# EAGLE board TFG_sch_V2 (EAGLE 7.5.0)
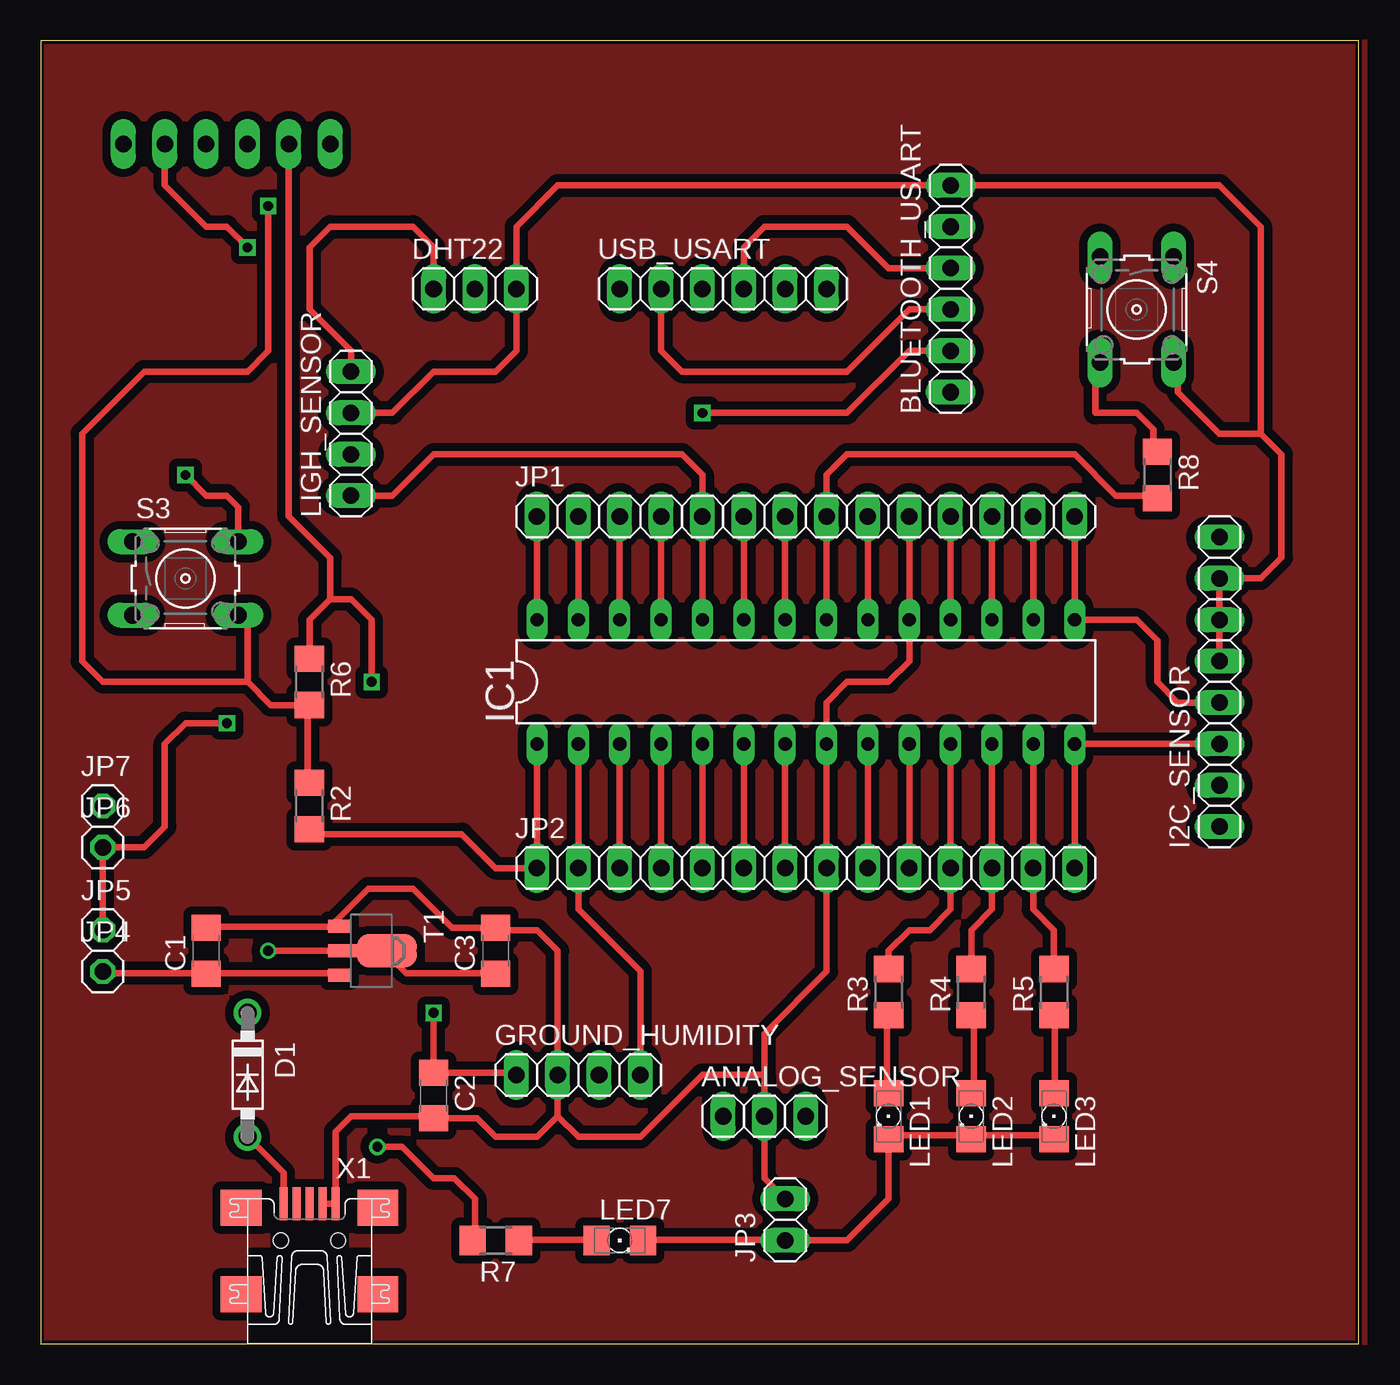
[diagram p0: board, top side]
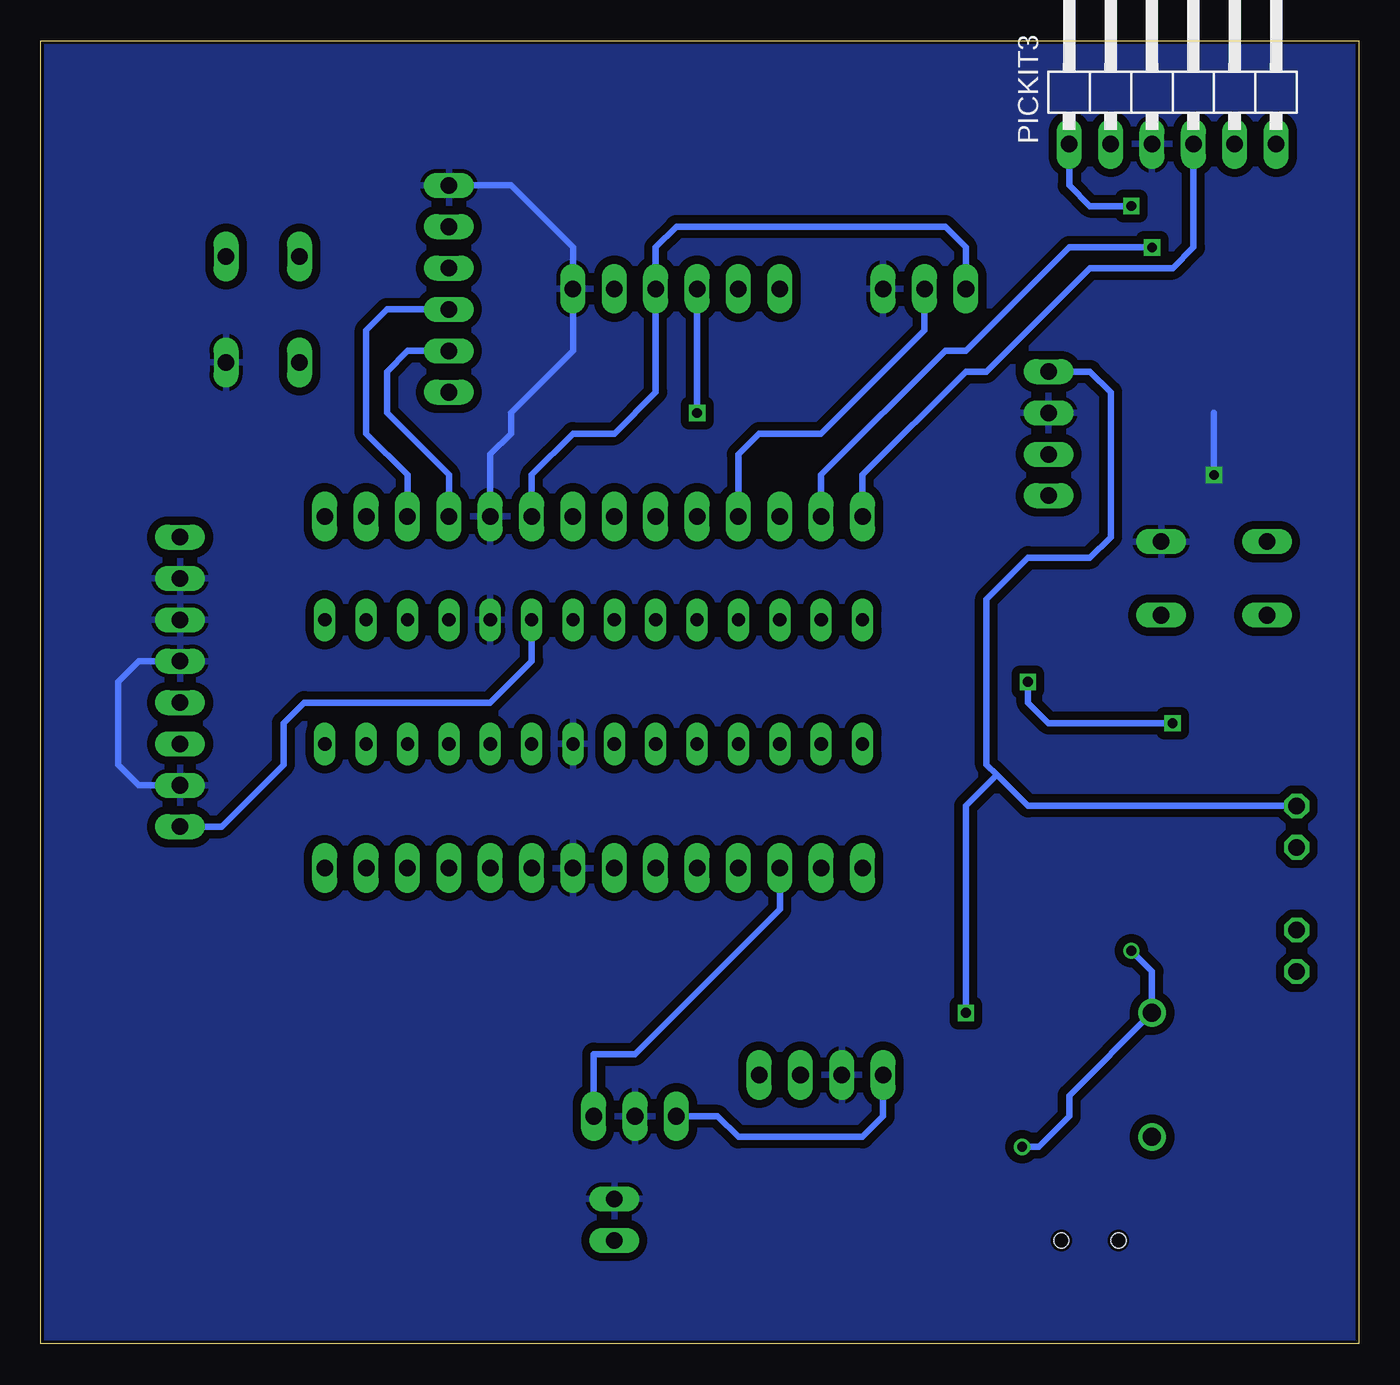
[diagram p1: board, bottom side, seen from below]

Size 80.95 x 80 mm. Coordinates in mm from the lower left corner, seen from the top.
Outline: 0,0 80.95,0 80.95,80 0,80 0,0
Copper layers (1*16): Top 0.035mm / dielectric 1.5mm / Bottom 0.035mm
Design rules "default *": minimum track width 16mil, minimum drill 16mil, track to track 20mil, track to pad 8mil, pad to pad 8mil, via to via 8mil, smd to smd 8mil, copper to edge 8mil, drill to drill 8mil, minimum pad ring 10mil, minimum via ring 8mil, stop-mask expansion 4mil, vias tented up to drill 0mil, thermal gap 10mil
Net classes: 0 PCB: width 0.004 mm

## Footprints (pad centres in the part's own frame; a part is rotated, then mirrored left to right if it is on the bottom)
1X03 = drill 1.016 long: 1 -2.54,0; 2 0,0; 3 2.54,0
1X06 = drill 1.016 long: 1 -6.35,0; 2 -3.81,0; 3 -1.27,0; 4 1.27,0; 5 3.81,0; 6 6.35,0
C1206 = smd 1.6 x 1.8: 1 -1.4,0; 2 1.4,0
DO41-7.6 = drill 1.1 pad 1.7: A 3.81,0; C -3.81,0
1X04 = drill 1.016 long: 1 -3.81,0; 2 -1.27,0; 3 1.27,0; 4 3.81,0
1X08 = drill 1.016 long: 1 -8.89,0; 2 -6.35,0; 3 -3.81,0; 4 -1.27,0; 5 1.27,0; 6 3.81,0; 7 6.35,0; 8 8.89,0
DIL28-3 = drill 0.813 long: 1 -16.51,-3.81; 2 -13.97,-3.81; 3 -11.43,-3.81; 4 -8.89,-3.81; 5 -6.35,-3.81; 6 -3.81,-3.81; 7 -1.27,-3.81; 8 1.27,-3.81; 9 3.81,-3.81; 10 6.35,-3.81; 11 8.89,-3.81; 12 11.43,-3.81; 13 13.97,-3.81; 14 16.51,-3.81; 15 16.51,3.81; 16 13.97,3.81; 17 11.43,3.81; 18 8.89,3.81; 19 6.35,3.81; 20 3.81,3.81; 21 1.27,3.81; 22 -1.27,3.81; 23 -3.81,3.81; 24 -6.35,3.81; 25 -8.89,3.81; 26 -11.43,3.81; 27 -13.97,3.81; 28 -16.51,3.81
1X14 = drill 1.016 long: 1 -16.51,0; 2 -13.97,0; 3 -11.43,0; 4 -8.89,0; 5 -6.35,0; 6 -3.81,0; 7 -1.27,0; 8 1.27,0; 9 3.81,0; 10 6.35,0; 11 8.89,0; 12 11.43,0; 13 13.97,0; 14 16.51,0
1X02 = drill 1.016 long: 1 -1.27,0; 2 1.27,0
1X01 = drill 1.016 octagon: 1 0,0
LED_1206 = smd 1.6 x 1.803: A -1.422,0; C 1.422,0
1X06/90 = drill 1.016 long: 1 -6.35,-3.81; 2 -3.81,-3.81; 3 -1.27,-3.81; 4 1.27,-3.81; 5 3.81,-3.81; 6 6.35,-3.81
R1206 = smd 1.6 x 1.803: 1 -1.422,0; 2 1.422,0
B3F-10XX = drill 1.016 long: 1 -3.251,2.261; 2 3.251,2.261; 3 -3.251,-2.261; 4 3.251,-2.261
SOT89 = smd 0.8 x 1.4: 1 -1.499,-1.981; 3 1.499,-1.981 | smd 0.8 x 1.9: 2 0,-1.727 | smd 2.032 x 3.65: 2@1 0,0.94
UX60-MB-5ST = smd 2 x 0.5: 1 2.25,1.6; 2 2.25,0.8; 3 2.25,0; 4 2.25,-0.8; 5 2.25,-1.6 | smd 2.2 x 2.5: M1 -3.3,-4.2; M2 -3.3,4.2; M3 2,4.2; M4 2,-4.2 | hole 0.9: 0,-1.75; 0,1.75

## Placement (x,y rotation side)
ANALOG_SENSOR  [1X03]  44.45,13.97 0 top
BLUETOOTH_USART  [1X06]  55.88,64.77 90 top
C1  10uF  [C1206]  10.16,24.13 90 top
C2  1uF  [C1206]  24.13,15.24 270 top
C3  10uF  [C1206]  27.94,24.13 90 top
D1  1N5819-T  [DO41-7.6]  12.7,16.51 270 top
DHT22  [1X03]  26.67,64.77 0 top
GROUND_HUMIDITY  [1X04]  33.02,16.51 0 top
I2C_SENSOR  [1X08]  72.39,40.64 90 top
IC1  PIC18F2580-I/SP  [DIL28-3]  46.99,40.64 0 top
JP1  [1X14]  46.99,50.8 0 top
JP2  [1X14]  46.99,29.21 0 top
JP3  [1X02]  45.72,7.62 90 top
JP4  Vusb  [1X01]  3.81,22.86 0 top
JP5  Vcc  [1X01]  3.81,25.4 0 top
JP6  Current Meter  [1X01]  3.81,30.48 0 top
JP7  Current Meter  [1X01]  3.81,33.02 0 top
LED1  [LED_1206]  52.07,13.97 270 top
LED2  [LED_1206]  57.15,13.97 270 top
LED3  [LED_1206]  62.23,13.97 270 top
LED7  [LED_1206]  35.56,6.35 0 top
LIGH_SENSOR  [1X04]  19.05,55.88 90 top
PICKIT3  [1X06/90]  11.43,77.47 0 bottom
R2  470  [R1206]  16.51,33.02 270 top
R3  470  [R1206]  52.07,21.59 90 top
R4  470  [R1206]  57.15,21.59 90 top
R5  470  [R1206]  62.23,21.59 90 top
R6  470  [R1206]  16.51,40.64 270 top
R7  470  [R1206]  27.94,6.35 180 top
R8  470  [R1206]  68.58,53.34 270 top
S3  [B3F-10XX]  8.89,46.99 0 top
S4  [B3F-10XX]  67.31,63.5 270 top
T1  AP1115  [SOT89]  20.32,24.13 270 top
USB_USART  [1X06]  41.91,64.77 0 top
X1  MINI-USB-UX60-MB-5ST  [UX60-MB-5ST]  16.51,6.35 90 top

## Library data of the parts
ANALOG_SENSOR BLUETOOTH_USART DHT22 GROUND_HUMIDITY I2C_SENSOR JP1-JP7 LIGH_SENSOR PICKIT3 USB_USART = pinhead
C1-C3 = rcl
D1 = diode
IC1 = microchip; MF: MICROCHIP; MPN: PIC18F2580-I/SP; OC_FARNELL: 9321276; OC_NEWARK: 71J7244
LED1-LED3 LED7 = eagle-ltspice; SPICEMODEL: NONE; SPICEPREFIX: D; SPICETYPE: diode
R2-R8 = resistor
S3 S4 = switch-omron; MPN: B3F-1000; OC_FARNELL: 176432; OC_NEWARK: 36M3542
T1 = zetex; OC_FARNELL: unknown; OC_NEWARK: unknown
X1 = con-hirose; OC_FARNELL: unknown; OC_NEWARK: unknown

## Nets
GND: ANALOG_SENSOR.2 BLUETOOTH_USART.6 C1.2 C2.2 C3.2 DHT22.3 GROUND_HUMIDITY.2 I2C_SENSOR.2 I2C_SENSOR.5 I2C_SENSOR.6 I2C_SENSOR.7 IC1.8 IC1.19 JP1.10 JP2.8 JP3.2 LIGH_SENSOR.3 PICKIT3.3 S3.2 S4.2 T1.1 USB_USART.6 X1.4 X1.5
N$1: PICKIT3.1 R2.1 R6.2 S3.4
N$2: GROUND_HUMIDITY.4 IC1.2 JP2.2
N$3: ANALOG_SENSOR.3 IC1.3 JP2.3
N$4: IC1.4 JP2.4
N$5: IC1.5 JP2.5
N$6: IC1.6 JP2.6
N$7: IC1.7 JP2.7
N$8: I2C_SENSOR.3 IC1.14 JP2.14
N$9: IC1.9 JP2.9
N$10: IC1.10 JP2.10
N$11: IC1.11 JP2.11 R3.2
N$12: IC1.12 JP2.12 R4.2
N$13: IC1.13 JP2.13 R5.2
N$15: IC1.28 JP1.1 PICKIT3.4
N$16: IC1.27 JP1.2 PICKIT3.5
N$17: IC1.26 JP1.3
N$18: DHT22.2 IC1.25 JP1.4
N$19: IC1.24 JP1.5 LIGH_SENSOR.1
N$20: IC1.23 JP1.6
N$21: IC1.22 JP1.7
N$22: IC1.21 JP1.8 R8.2
N$23: IC1.1 JP2.1 R2.2
N$24: R8.1 S4.4
N$25: BLUETOOTH_USART.2 IC1.18 JP1.11 USB_USART.3
N$26: BLUETOOTH_USART.3 IC1.17 JP1.12 USB_USART.2
N$27: IC1.16 JP1.13
N$28: I2C_SENSOR.4 IC1.15 JP1.14
N$29: PICKIT3.6
N$31: LED1.A R3.1
N$32: LED2.A R4.1
N$33: LED3.A R5.1
N$34: JP3.1 LED1.C LED2.C LED3.C LED7.C
N$35: LED7.A R7.1
N$36: D1.A X1.1
N$37: C3.1 D1.C R7.2 T1.2 T1.2@1
N$38: JP5.1 JP6.1 PICKIT3.2 R6.1
VCC: ANALOG_SENSOR.1 BLUETOOTH_USART.4 C2.1 DHT22.1 GROUND_HUMIDITY.1 I2C_SENSOR.1 IC1.20 JP1.9 JP7.1 LIGH_SENSOR.4 USB_USART.4
VO: C1.1 JP4.1 T1.3

## Tracks (layer width: path | path; a pad name or v marks a point on that pad's centre or on a via)
GND  (via drill 0.6)
  Top 0.406: 17.78,25.6 10.36,25.6 C1.2 | 17.78,25.6 18.19,25.6 T1.1 | 44.5,13.87 ANALOG_SENSOR.2 | 17.78,25.6 20.12,27.94 22.86,27.94 25.27,25.53 C3.2 28.07,25.4 30.48,25.4 31.75,24.13 GROUND_HUMIDITY.2 31.75,13.97 | LIGH_SENSOR.3 21.59,57.15 24.13,59.69 27.94,59.69 29.21,60.96 DHT22.3 29.21,68.58 31.75,71.12 BLUETOOTH_USART.6 72.39,71.12 74.93,68.58 74.93,55.88 | JP1.10 IC1.19 53.34,41.91 52.07,40.64 49.53,40.64 48.26,39.37 IC1.8 JP2.8 48.26,22.86 44.45,19.05 44.45,16.51 | I2C_SENSOR.5 I2C_SENSOR.6 I2C_SENSOR.7 74.93,46.99 76.2,48.26 76.2,54.61 74.93,55.88 | 74.93,55.88 72.39,55.88 69.85,58.42 69.85,59.97 S4.2 | 31.75,13.97 30.48,12.7 27.94,12.7 26.8,13.84 C2.2 24,13.97 19.05,13.97 18.11,13.03 X1.5 X1.4 | 31.75,13.97 33.02,12.7 36.83,12.7 40.64,16.51 44.45,16.51 | 44.45,16.51 ANALOG_SENSOR.2 | JP3.2 44.45,10.16 ANALOG_SENSOR.2 | S3.2 12.14,51.36 11.43,52.07 10.16,52.07 v8.89,53.34
  Bottom 0.406: I2C_SENSOR.2 74.93,34.29 76.2,35.56 76.2,40.64 74.93,41.91 I2C_SENSOR.5 | BLUETOOTH_USART.6 52.07,71.12 48.26,67.31 USB_USART.6 48.26,60.96 52.07,57.15 52.07,55.88 53.34,54.61 JP1.10 | v8.89,53.34 8.89,57.15
  pour Bottom: 0,80.01 81.28,80.01 81.28,0 0,0
N$1  (via drill 0.6)
  Top 0.406: R2.1 16.41,34.49 16.41,39.12 R6.2 14.12,39.22 12.7,40.64 | 12.7,40.64 12.7,44.17 S3.4 | v13.97,69.85 13.97,60.96 12.7,59.69 6.35,59.69 2.54,55.88 2.54,41.91 3.81,40.64 12.7,40.64
  Bottom 0.406: PICKIT3.1 17.78,71.12 16.51,69.85 v13.97,69.85
N$2
  Top 0.406: IC1.2 JP2.2 33.02,26.67 36.83,22.86 GROUND_HUMIDITY.4
N$3
  Top 0.406: JP2.3 IC1.3
  Bottom 0.406: ANALOG_SENSOR.3 46.99,17.78 44.45,17.78 35.56,26.67 JP2.3
N$4
  Top 0.406: JP2.4 IC1.4
N$5
  Top 0.406: IC1.5 JP2.5
N$6
  Top 0.406: JP2.6 IC1.6
N$7
  Top 0.406: IC1.7 JP2.7
N$8
  Top 0.406: JP2.14 IC1.14 I2C_SENSOR.3
N$9
  Top 0.406: JP2.9 IC1.9
N$10
  Top 0.406: JP2.10 IC1.10
N$11
  Top 0.406: 52.32,23.11 R3.2 52.07,24.13 53.34,25.4 54.61,25.4 55.88,26.67 JP2.11 IC1.11
N$12
  Top 0.406: R4.2 57.15,25.4 58.42,26.67 JP2.12 IC1.12
N$13
  Top 0.406: R5.2 62.23,25.4 60.96,26.67 JP2.13 IC1.13
N$14
  pour Top: 0,80.01 81.28,80.01 81.28,0 0,0
N$15
  Top 0.406: JP1.1 IC1.28
  Bottom 0.406: JP1.1 30.48,53.34 24.13,59.69 22.86,59.69 16.51,66.04 11.43,66.04 10.16,67.31 PICKIT3.4
N$16  (via drill 0.6)
  Top 0.406: JP1.2 IC1.27 | v12.7,67.31 11.43,68.58 10.16,68.58 7.62,71.12 PICKIT3.5
  Bottom 0.406: JP1.2 33.02,53.34 25.4,60.96 24.13,60.96 17.78,67.31 v12.7,67.31
N$17
  Top 0.406: JP1.3 IC1.26
N$18
  Top 0.406: IC1.25 JP1.4
  Bottom 0.406: DHT22.2 26.67,62.23 33.02,55.88 36.83,55.88 38.1,54.61 JP1.4
N$19
  Top 0.406: LIGH_SENSOR.1 21.59,52.07 24.13,54.61 39.37,54.61 40.64,53.34 JP1.5 IC1.24
N$20
  Top 0.406: JP1.6 IC1.23
N$21
  Top 0.406: JP1.7 IC1.22
N$22
  Top 0.406: IC1.21 JP1.8 48.26,53.34 49.53,54.61 63.5,54.61 66.04,52.07 68.43,52.07 R8.2
N$23
  Top 0.406: R2.2 16.76,31.29 25.86,31.29 27.94,29.21 JP2.1 IC1.1
N$24
  Top 0.406: R8.1 68.33,54.76 68.33,56.13 67.31,57.15 64.77,57.15 64.77,59.97 S4.4
N$25  (via drill 0.6)
  Top 0.406: IC1.18 JP1.11 | v40.64,57.15 49.53,57.15 53.34,60.96 BLUETOOTH_USART.2
  Bottom 0.406: JP1.11 55.88,53.34 59.69,57.15 59.69,59.69 58.42,60.96 BLUETOOTH_USART.2 | USB_USART.3 v40.64,57.15
N$26
  Top 0.406: JP1.12 IC1.17 | USB_USART.2 38.1,60.96 39.37,59.69 49.53,59.69 53.34,63.5 BLUETOOTH_USART.3
  Bottom 0.406: JP1.12 58.42,53.34 60.96,55.88 60.96,62.23 59.69,63.5 BLUETOOTH_USART.3
N$27
  Top 0.406: JP1.13 IC1.16
N$28
  Top 0.406: JP1.14 IC1.15 67.31,44.45 68.58,43.18 68.58,40.64 69.85,39.37 I2C_SENSOR.4
N$31
  Top 0.406: LED1.A 51.97,15.65 51.97,19.91 R3.1
N$32
  Top 0.406: LED2.A 57.3,15.65 57.3,19.91 R4.1
N$33
  Top 0.406: LED3.A 62.28,15.65 62.28,19.91 R5.1
N$34
  Top 0.406: LED3.C 61.93,12.8 57.3,12.8 LED2.C 56.95,12.8 52.32,12.8 LED1.C 52.07,8.89 49.53,6.35 JP3.1 45.57,6.4 37.03,6.4 LED7.C
N$35
  Top 0.406: R7.1 29.57,6.4 33.83,6.4 LED7.A
N$36
  Top 0.406: X1.1 14.91,10.49 D1.A
N$37  (via drill 0.6, 0.61)
  Top 0.406: C3.1 27.79,22.76 22.45,22.76 21.39,23.82 T1.2@1 | 26.37,6.4 R7.2 26.67,6.5 26.67,8.89 25.4,10.16 24.13,10.16 22.2,12.09 v20.68,12.09 | v13.97,24.13 T1.2
  Bottom 0.406: v13.97,24.13 12.7,22.86 D1.C 17.78,15.24 17.78,13.97 19.66,12.09 v20.68,12.09
N$38  (via drill 0.6)
  Top 0.406: v20.32,40.64 20.32,44.45 19.05,45.72 17.78,45.72 | 17.78,45.72 16.51,44.45 R6.1 | 17.78,45.72 17.78,48.26 15.24,50.8 PICKIT3.2 | JP5.1 JP6.1 6.35,30.48 7.62,31.75 7.62,36.83 8.89,38.1 v11.43,38.1
  Bottom 0.406: v20.32,40.64 20.32,39.37 19.05,38.1 v11.43,38.1
VCC  (via drill 0.6)
  Top 0.406: IC1.20 JP1.9 | LIGH_SENSOR.4 19.05,60.96 16.51,63.5 16.51,67.31 17.78,68.58 22.86,68.58 24.13,67.31 DHT22.1 | GROUND_HUMIDITY.1 29.08,16.64 C2.1 v24.13,20.32 | BLUETOOTH_USART.4 52.07,66.04 49.53,68.58 44.45,68.58 43.18,67.31 USB_USART.4
  Bottom 0.406: 22.23,34.92 22.86,35.56 22.86,45.72 20.32,48.26 16.51,48.26 15.24,49.53 15.24,58.42 16.51,59.69 LIGH_SENSOR.4 | I2C_SENSOR.1 69.85,31.75 66.04,35.56 66.04,38.1 64.77,39.37 53.34,39.37 50.8,41.91 IC1.20 | JP1.9 50.8,53.34 48.26,55.88 45.72,55.88 43.18,58.42 USB_USART.4 43.18,67.31 41.91,68.58 25.4,68.58 24.13,67.31 DHT22.1 | v24.13,20.32 24.13,33.02 22.23,34.92 | GROUND_HUMIDITY.1 29.21,13.97 30.48,12.7 38.1,12.7 39.37,13.97 ANALOG_SENSOR.1 | JP7.1 20.32,33.02 22.23,34.92
VO
  Top 0.406: T1.3 18.19,22.76 10.36,22.76 C1.1 10.01,22.76 3.96,22.76 JP4.1